# Altium PCB USB Wi-Fi.PcbDoc (part 2 of 2)
Units mm, origin at the board's own origin, x right, y up, seen from the top; angles counter-clockwise.
Board outline 24.6 x 61.64 mm, 2 copper layers (Top, Bottom), stack 1.535 mm thick; 80 components, 55 nets, 291 pads, 187 vias.
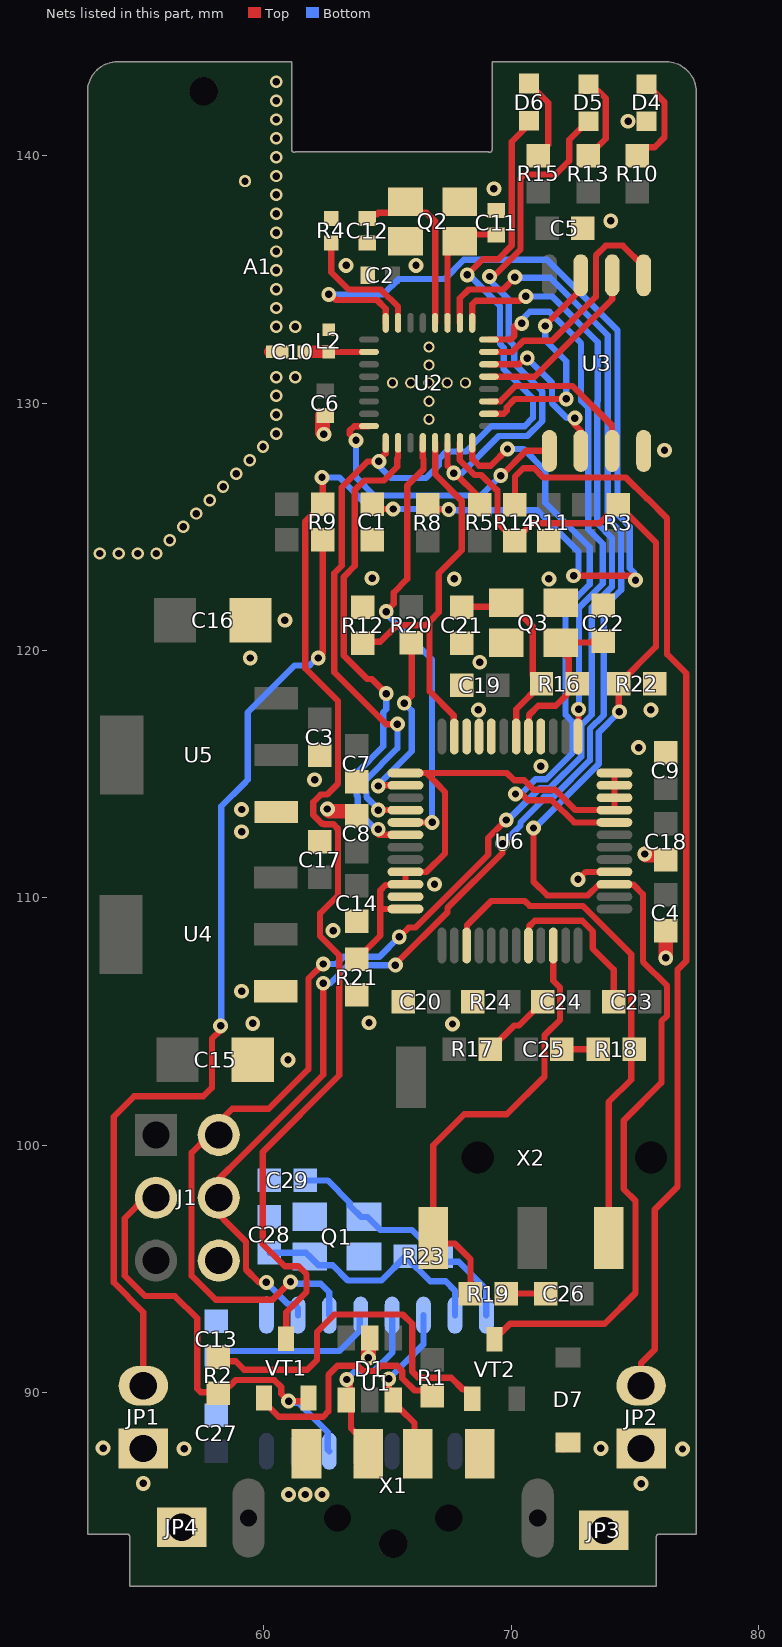
[diagram p2: the nets of this part, all layers, seen from the top]

## Via types
v1: diameter 0.6, hole 0.3, Top to Bottom, tented both sides, 129 vias
v2: diameter 0.5, hole 0.3, Top to Bottom, tented both sides, 58 vias

## Nets (pads, with @x,y where several pads share a name; then routed paths per layer and width w, separated by ;. In a path a pad name is that pad's centre, name@x,y a point inside that pad or via, vN(x,y) a via of type N, cw(c..) or ccw(c..) an arc to the next point about the centre after c; other vN are vias at no path point) (continued)
GND: A1.2 C1.1 C2.1 C3.1 C4.1 C5.2 C6.1 C7.1 C8.1 C9.1 C11.1 C12.1 C13.1 C14.1 C15.2 C16.2 C17.1 C18.1 C19.1 C20.1 C21.1 C22.1 C27.1 C28.1 C29.1 D1.2 D4.2 J1.6 JP1.1 JP2.1 JP4.1 L2.1 Q1.2 Q1.4 Q2.2 Q2.4 Q3.2 Q3.4 R4.2 R11.1 R12.1 R21.1 R22.1 R24.1 U1.1 U2.33 U3.4 U4.1 U5.1 U6.4 U6.16 U6.20 U6.21 U6.22 U6.35 X1.4 | length 6.6
  Top w0.254: v1(64.225,91.4) 64.275,91.4 v1@64.288,91.412 ; D1.2@64.275,92.2 D1.2@64.288,92.187 ; v1(72.7,110.75) 72.722,110.75 73.022,111.05 U6.4@74.175,111.05
  Top w0.6: v1@62.375,128.823 62.375,129.5 C6.1@62.475,129.5 ; v1(62.569,113.594) 62.659,113.504 63.037,113.504 63.041,113.5 63.575,113.5 C8.1@63.75,113.325 ; v1(64.225,91.4) 64.225,92.15 D1.2@64.275,92.2 ; v1(75.4,111.775) 75.45,111.725 76.075,111.725 C18.1@76.25,111.55 ; v1(76.25,107.575) C4.1@76.25,108.675
  other v1: 61,85.875 61.675,85.875 62.35,85.875 75.25,86.315 55.125,86.325 76.925,87.715 56.775,87.725 73.625,87.74 53.5,87.75 60.975,103.45 67.625,104.9 59.55,104.925 64.25,104.95 59.1,106.225 62.8,108.675 66.9,110.55 59.1,112.675 59.1,113.575 62.05,114.775 71.2,115.325 75.15,116.075 68.675,117.6 75.65,117.6 68.725,119.525 59.45,119.7 60.85,121.225 67.7,122.9 71.525,122.9 64.375,122.925 76.2,128.1 62.425,128.75 63.325,135.575 66.15,135.575 74.025,137.375 69.3,138.675 74.725,141.4
  other v2: 53.369,123.924 54.131,123.924 54.893,123.924 55.655,123.924 56.194,124.462 56.733,125.001 57.271,125.54 57.81,126.079 58.349,126.618 58.888,127.157 59.427,127.695 59.966,128.234 60.504,128.773 60.504,129.535 60.504,130.297 60.504,131.059 61.266,131.059 60.504,133.091 61.266,133.091 60.504,133.853 60.504,134.615 60.504,135.377 60.504,136.139 60.504,136.901 60.504,137.663 60.504,138.425 60.504,139.187 60.504,139.949 60.504,140.711 60.504,141.473 60.504,142.235 60.504,142.997
GPIO00: R3.2 R14.1 R22.2 U2.15 U6.3 VT2.3 | length 57
  Top w0.254: U2.15@67.925,128.4 67.925,127.702 68.531,127.096 68.8,127.096 69.348,126.548 69.377,126.548 69.448,126.477 69.448,125.152 R14.1@70.15,124.45 70.852,125.152 72.094,125.152 72.096,125.15 72.329,125.15 72.331,125.152 73.577,125.152 R3.2@74.325,125.9 ; VT2.3@69.325,92.15 69.95,92.775 73.775,92.775 75.025,94.025 75.025,97.75 74.55,98.225 74.55,101 76.075,102.525 76.075,105.004 76.302,105.231 76.302,106.448 75.325,107.425 75.325,110.15 74.943,110.532 74.193,110.532 U6.3@74.175,110.55 73.556,110.55 73.106,110.1 71.45,110.1 70.9,110.65 v1(70.9,112.825) ; R3.2@74.15,126.075 R3.2@74.325,125.9 ; v1(74.375,117.525) 74.35,117.55 R22.2@74.35,118.65 75.852,120.152 75.852,124.373 R3.2@74.325,125.9
  Bottom w0.254: v1(70.9,112.825) 70.947,112.825 73.537,115.415 73.537,116.687 v1(74.375,117.525)
GPIO02: D5.2 R5.2 U2.14 | length 23.3
  Top w0.254: U2.14@67.425,128.4 67.425,127.804 67.427,127.802 67.427,127.473 67.7,127.2 68.725,126.175 R5.2@68.725,125.9 R5.2@68.493,126.132 ; v1(69.125,135.125) 69.125,135.025 69.15,135 70.379,136.229 70.379,139.1 70.531,139.252 71.802,139.252 72.35,139.8 72.35,140.65 73.1,141.4 D5.2@73.125,141.4
  Bottom w0.254: v1@67.9,127.15 67.975,127.15 69.502,128.677 70.648,128.677 71.25,129.279 71.25,130.48 70.123,131.607 70.123,132.328 69.9,132.551 69.9,133.445 69.904,133.449 69.904,134.196 69.125,134.975 v1(69.125,135.125)
  other v1: 67.675,127.175
GPIO04: U2.16 U6.8 | length 24.5
  Top w0.254: U2.16@68.425,128.4 68.425,127.75 68.7,127.475 69.175,127.475 v1(69.85,128.15) ; v1(70.175,114.2) 70.425,114.2 70.675,113.95 71.645,113.95 72.545,113.05 U6.8@74.175,113.05
  Bottom w0.254: v1(69.85,128.15) 70.5,128.15 71.375,127.275 71.375,125.975 73.175,124.175 73.175,122.675 72.198,121.698 72.198,117.407 72.475,117.13 72.475,115.855 71.418,114.798 70.982,114.798 70.359,114.175 v1@70.15,114.175
GPIO05: U2.24 U6.13 | length 21.9
  Top w0.254: U2.24@69.1,132.575 69.227,132.575 69.229,132.577 69.977,132.577 70.118,132.718 70.118,133.098 70.141,133.121 70.4,133.121 70.427,133.148 v1(70.427,133.227) ; U6.13@72.7,116.525 72.718,116.543 72.718,117.161 72.725,117.168 v1(72.725,117.625)
  Bottom w0.254: v1@70.427,133.077 v1(70.427,133.227) 70.427,133.377 70.75,133.7 71.545,133.7 72.825,132.42 72.825,130.1 73.113,129.813 73.113,126.554 73.121,126.545 73.121,124.904 73.704,124.321 73.704,122.703 72.744,121.743 72.744,117.644 v1(72.725,117.625)
GPIO12: U2.10 U6.30 | length 20.3
  Top w0.254: v1(64.625,112.775) 64.625,112.575 64.65,112.55 U6.30@65.725,112.55 ; v1(64.95,118.262) 64.362,118.85 64.175,118.85 63.225,119.8 63.225,122.975 63.673,123.423 63.673,126.494 64.052,126.873 64.843,126.873 65.398,127.428 65.398,127.768 65.425,127.795 U2.10@65.425,128.4
  Bottom w0.254: v1(64.625,112.775) 64.625,112.669 64.452,112.842 64.452,112.843 64.081,113.215 63.941,113.215 63.796,113.359 63.796,114.102 63.745,114.153 63.745,114.159 63.744,114.16 63.744,114.89 63.745,114.891 63.745,115.046 64.825,116.126 64.825,117.5 64.95,117.625 v1(64.95,118.262)
GPIO13: U2.12 U6.29 | length 17.8
  Top w0.254: v1(64.95,121.575) 64.95,121.599 65.248,121.897 65.248,122.344 65.8,122.896 65.8,126.675 66.452,127.327 66.452,127.768 66.425,127.795 U2.12@66.425,128.4 ; U6.29@65.725,113.05 v1(66.8,113.05)
  Bottom w0.254: v1(64.95,121.575) 64.95,121.481 66.8,119.631 v1(66.8,113.05)
GPIO14: D6.2 U2.9 U6.28 | length 42
  Top w0.254: v1(64.625,113.55) U6.28@65.725,113.55 ; U2.9@64.925,128.4 64.925,127.972 64.65,127.697 v1(64.65,127.65) 64.647,127.647 64.197,127.647 63.15,126.6 63.15,123.425 62.85,123.125 62.85,119.125 64.95,117.025 v1(65.4,117.025) ; v1(68.225,135.188) 68.225,135.2 68.853,135.828 69.474,135.828 70.025,136.379 70.025,140.575 70.85,141.4 D6.2@70.7,141.4 ; D6.2@70.475,141.4 D6.2@70.7,141.4 ; D6.2@70.725,141.425 D6.2@70.7,141.4
  Bottom w0.254: v1(64.625,113.55) 64.625,113.6 64.15,114.075 64.15,114.249 64.099,114.3 64.099,114.306 64.098,114.307 64.098,114.743 65.4,116.045 v1(65.4,117.025) ; v1(64.65,127.65) 64.65,127.469 65.144,126.975 66.55,126.975 67.073,127.498 67.073,127.743 67.382,128.052 68.177,128.052 69.2,129.075 70.545,129.075 70.877,129.407 70.877,130.198 69.7,131.375 69.7,132.25 69.546,132.404 69.546,133.592 69.55,133.596 69.55,133.931 68.293,135.188 v1(68.225,135.188) 68.225,135.27 v1@68.23,135.275
GPIO15: R12.2 U2.13 U6.23 | length 16.3
  Top w0.254: R12.2@64,120.3 64.053,120.353 64.707,120.353 65.381,121.027 66.552,121.027 66.7,121.175 ; U2.13@66.925,128.4 66.925,127.125 68.002,126.048 68.002,124.052 67.075,123.125 67.075,121.55 66.7,121.175 ; U6.23@67.7,116.525 67.682,116.543 67.682,117.161 67.675,117.168 67.675,117.376 66.7,118.351 66.7,121.175
GPIO16: U2.8 U3.1 | length 12.2
  Top w0.254: v1(63.725,128.5) 63.475,128.75 63.475,128.9 63.65,129.075 U2.8@64.25,129.075 ; v1@69.641,127.141 v1(69.575,127.075) 69.6,127.075 70.6,128.075 U3.1@71.545,128.075 71.545,128.252 71.385,128.412 U3.1@71.372,128.399
  Bottom w0.254: v1(63.725,128.5) 63.725,127 64.458,126.267 68.767,126.267 v1(69.575,127.075)
LO: R19.2 U6.46 X2.4 | length 18.3
  Top w0.254: R19.2@68.35,94 68.35,95.4 67.725,96.025 67.075,96.025 X2.4@66.85,96.25 66.85,100 68.1,101.25 69.825,101.25 71.348,102.773 71.348,104.444 71.977,105.073 71.977,106.369 71.7,106.646 U6.46@71.7,108.075
NetA1_1: A1.1 C10.1 | length 0.5
  Top w0.508: A1.1@60.25,132.075 C10.1@60.725,132.075
NetC11_2: C11.2 Q2.1 U2.27 | length 5.2
  Top w0.254: U2.27@67.425,133.25 67.425,136 67.975,136.55 68.25,136.825 C11.2@69.5,136.825
NetC12_2: C12.2 Q2.3 U2.28 | length 7.4
  Top w0.254: C12.2@64.225,137.475 64.398,137.648 64.57,137.648 64.624,137.702 65.327,137.702 65.775,138.15 66.223,137.702 66.573,137.702 66.925,137.35 U2.28@66.925,133.25
NetC13_2: C13.2 U1.4 | length 6.9
  Bottom w0.254: C13.2@58.075,91.425 58.325,91.675 63.05,91.675 63.88,92.505 63.88,93.09 U1.4@63.915,93.125
NetC21_2: C21.2 Q3.1 R16.1 U6.18 | length 7.9
  Top w0.254: C21.2@67.975,121.775 69.2,121.775 69.35,121.925 Q3.1@69.475,121.925 ; Q3.1@69.925,121.925 70.875,120.975 70.875,119 R16.1@71.225,118.65 70.2,117.625 U6.18@70.2,116.525
NetC22_2: C22.2 Q3.3 R16.2 U6.17 | length 7.8
  Top w0.254: U6.17@70.7,117.101 U6.17@70.7,116.525 70.718,116.543 70.718,117.393 71.097,117.772 71.797,117.772 R16.2@72.675,118.65 72.327,118.998 72.327,119.673 Q3.3@71.675,120.325 ; Q3.3@71.55,120.325 Q3.3@71.675,120.325 ; C22.2@73.275,120.375 73.225,120.325 Q3.3@71.675,120.325
NetC23_2: C23.2 U6.44 | length 6.8
  Top w0.254: U6.44@70.7,108.075 70.718,108.093 70.718,108.843 70.95,109.075 72.869,109.075 73.3,108.644 73.3,107.95 74.15,107.1 C23.2@74.15,105.8
NetC24_2: C24.2 R17.1 | length 2.9
  Top w0.254: R17.1@69.15,103.875 70.113,104.838 70.313,104.838 C24.2@71.275,105.8
NetC25_2: C25.2 R18.1 | length 1.5
  Top w0.254: C25.2@72.05,103.875 R18.1@73.525,103.875
NetC26_2: C26.2 R19.1 | length 1.6
  Top w0.254: R19.1@69.8,94 C26.2@71.4,94
NetC28_2: C28.2 Q1.1 R23.1 U1.7 | length 9.9
  Bottom w0.254: C28.2@60.225,95.65 61.7,95.65 Q1.1@61.85,95.5 62.207,95.143 62.782,95.143 63.4,94.525 64.75,94.525 R23.1@65.725,95.5 66.725,94.5 67.35,94.5 67.725,94.125 U1.7@67.725,93.125
NetC29_2: C29.2 Q1.3 R23.2 U1.8 | length 10.3
  Bottom w0.254: C29.2@61.675,98.575 62.575,98.575 63.477,97.673 63.477,97.548 63.925,97.1 Q1.3@64.05,97.1 64.175,97.1 64.7,96.575 65.975,96.575 67.05,95.5 R23.2@67.175,95.5 67.382,95.293 67.882,95.293 68.995,94.18 U1.8@68.995,93.125
NetD1_4: D1.4 U1.5 X1.3 | length 7.4
  Top w0.254: v1(63.35,90.525) 63.418,90.525 63.484,90.459 63.484,89.859 D1.4@63.325,89.7 63.525,89.5 63.525,88.547 63.674,88.398 63.752,88.398 64.225,87.925 X1.3@64.225,87.525
  Bottom w0.254: v1(63.35,90.525) 63.698,90.873 64.443,90.873 65.185,91.615 U1.5@65.185,93.125
NetD1_6: D1.6 U1.6 X1.2 | length 6.7
  Top w0.254: v1(65.05,90.55) 65.05,89.725 65.448,89.327 65.523,89.327 66.093,88.757 66.093,87.607 X1.2@66.175,87.525
  Bottom w0.254: v1(65.05,90.55) 66.455,91.955 U1.6@66.455,93.125
NetD4_1: D4.1 R10.1 | length 3.9
  Top w0.254: R10.1@75.1,140 75.448,140.348 75.798,140.348 76.2,140.75 76.2,142.175 D4.1@75.475,142.9
NetD5_1: D5.1 R13.2 | length 3.6
  Top w0.254: R13.2@73.125,140 73.825,140.7 73.825,142.325 73.523,142.627 73.398,142.627 D5.1@73.125,142.9
NetD6_1: D6.1 R15.2 | length 3.5
  Top w0.254: D6.1@70.725,142.925 71.5,142.15 71.5,140.45 71.398,140.348 71.373,140.348 R15.2@71.025,140
NetD7_1: D7.1 JP3.1 X1.1 | length 0.2
  Top w0.6: D7.1@72.1,87.876 72.1,87.88 72.2,87.98 D7.1@72.3,87.98
NetJP1_2: JP1.2 R9.1 | length 40.5
  Top w0.254: JP1.2@55.125,90.275 55.125,93.25 53.925,94.45 53.925,101.15 54.75,101.975 57.548,101.975 57.9,102.327 57.9,104.304 58.25,104.654 v1(58.25,104.825) 58.396,104.825 v1@58.398,104.827 ; v1(62.2,119.7) 62.375,119.875 R9.1@62.375,124.475
  Bottom w0.254: v1(58.25,104.825) 58.328,104.825 58.411,104.908 58.275,105.044 58.275,113.7 59.2,114.625 ; 59.201,114.625 59.35,114.774 59.35,117.5 61.25,119.4 61.85,119.4 62.15,119.7 v1(62.2,119.7)
NetJP2_2: JP2.2 R14.2 | length 44.4
  Top w0.254: R14.2@70.15,125.9 70.15,127.025 70.494,127.369 70.524,127.369 70.53,127.375 70.925,127.375 71.302,126.998 74.627,126.998 75.473,126.152 75.493,126.152 76.304,125.341 76.304,119.846 77.075,119.075 77.075,107.448 76.725,107.098 76.725,104.875 76.726,104.874 76.726,98.326 75.8,97.4 75.8,91.74 75.25,91.19 JP2.2@75.25,90.265
NetR1_1: R1.1 VT1.1 | length 10
  Top w0.254: VT1.1@60.198,89.577 VT1.1@60,89.775 60,89.6 60.198,89.402 60.223,89.402 60.6,89.025 62.4,89.025 62.609,89.234 62.609,90.709 62.977,91.077 63.803,91.077 64.007,90.873 64.518,90.873 64.722,91.077 65.393,91.077 65.6,90.87 65.6,90.575 66.093,90.082 66.593,90.082 R1.1@66.8,89.875
NetR2_1: R2.1 VT2.1 | length 14.7
  Top w0.254: R2.1@58.15,91.425 58.307,91.268 58.857,91.268 59.2,90.925 61.75,90.925 62.15,91.325 62.15,92.45 62.85,93.15 65.625,93.15 66,92.775 66,90.85 66.25,90.6 67.575,90.6 68.052,90.123 68.227,90.123 68.425,89.925 VT2.1@68.425,89.75
NetR4_1: R4.1 U2.31 | length 5.1
  Top w0.254: R4.1@62.725,136.475 62.725,135.3 63.427,134.598 64.727,134.598 65.425,133.9 U2.31@65.425,133.25
NetR20_1: R20.1 U6.26 | length 7.7
  Top w0.254: v1(64.625,114.525) 64.65,114.55 U6.26@65.725,114.55 ; v1(65.675,117.875) 65.975,118.175 65.975,120.3 R20.1@65.95,120.325
  Bottom w0.254: v1(64.625,114.525) 64.625,114.575 65.975,115.925 65.975,117.575 v1(65.675,117.875)
NetR21_2: R21.2 U6.9 U6.10 U6.11 U6.12 U6.25 U6.33 U6.34 U6.36 | length 21.2
  Top w0.254: R21.2@63.75,107.525 64.7,108.475 64.7,109.612 ; U6.34@65.075,110.525 64.925,110.525 64.7,110.3 64.7,109.612 ; U6.36@65.725,109.55 64.762,109.55 64.7,109.612 ; U6.34@65.725,110.55 U6.33@65.725,111.05 66.575,111.05 67.327,111.802 67.327,114.268 66.575,115.05 ; U6.25@65.725,115.05 66.575,115.05 ; U6.12@74.175,115.05 U6.11@74.175,114.55 U6.10@74.175,114.05 U6.9@74.175,113.55 72.6,113.55 71.775,114.375 70.904,114.375 70.526,114.753 70.122,114.753 69.824,115.05 66.575,115.05
nRST: C1.2 R8.2 R9.2 U2.32 VT1.3 | length 84.7
  Top w0.254: VT1.3@60.9,92.175 60.9,93.25 61.725,94.075 61.725,94.775 61.4,95.1 60.85,95.1 59.95,96 59.95,99.725 63.048,102.823 63.048,107.682 62.273,108.457 62.273,109.373 63,110.1 63,112.798 62.952,112.798 62.952,112.844 62.819,112.977 62.441,112.977 62.418,113 62.35,113 62,113.35 62,113.875 62.302,114.177 62.552,114.177 63,114.625 63,117.95 61.673,119.277 61.673,125.223 R9.2@62.375,125.925 62.375,126.975 v1(62.35,127) ; v1(62.625,134.4) 62.694,134.4 62.917,134.177 64.573,134.177 64.925,133.825 U2.32@64.925,133.25 ; C1.2@64.375,125.925 64.4,125.95 64.625,125.725 v1(65.225,125.725) ; R8.2@66.625,125.9 66.825,125.7 v1(67.475,125.7) ; v1(72.525,123.025) 74.85,123.025 v1(75.025,122.85)
  Bottom w0.254: v1(62.35,127) 63.05,127 64.325,125.725 v1(65.225,125.725) v1@67.475,125.725 ; v1(62.625,134.4) 64.825,134.4 65.45,135.025 67.305,135.025 68.082,135.802 71.448,135.802 74.298,132.952 74.298,125.792 74.3,125.79 74.3,125.5 74.798,125.002 74.798,123.332 74.959,123.171 74.959,122.916 v1(75.025,122.85) ; v1(72.525,123.025) 72.719,123.219 72.719,124.006 71.05,125.675 67.7,125.675 v1@67.575,125.8 ; v1@67.475,125.725 v1@67.5,125.725 ; v1@67.475,125.725 v1(67.475,125.7) v1@67.5,125.725 ; v1@67.5,125.725 v1@67.575,125.8 ; v1@67.5,125.725 67.65,125.725 v1@67.575,125.8
RF: C10.2 L2.2 U2.2 | length 2.8
  Top w0.254: L2.2@62.625,132.075 U2.2@64.25,132.075
  Top w0.508: C10.2@61.625,132.075 L2.2@62.625,132.075 L2.2@62.43,132.075
RO: R18.2 U6.39 X2.2 | length 20.7
  Top w0.254: U6.39@68.2,108.075 68.212,108.087 68.212,108.892 69.195,109.875 70.55,109.875 70.75,109.675 72.901,109.675 74.852,107.724 74.852,105.231 74.85,105.229 74.85,104 R18.2@74.975,103.875 74.85,103.75 74.85,102.65 73.95,101.75 X2.2@73.95,96.25
RTS: J1.3 R2.2 U1.14 VT1.2 | length 18.4
  Top w0.254: J1.3@55.275,97.95 54.375,97.05 54.375,94.725 55.2,93.9 56.4,93.9 57.3,93 57.3,90.875 57.3,90.156 57.449,90.007 58.118,90.007 R2.2@58.15,89.975 ; R2.2@58.182,89.993 58.343,89.993 58.852,90.502 60.419,90.502 60.7,90.221 60.7,89.95 v1(61,89.65) 61.8,89.65 VT1.2@61.8,89.775
  Bottom w0.254: v1(61,89.65) 61.065,89.585 61.39,89.585 62.579,88.396 62.579,87.691 U1.14@62.645,87.625
RXD0: J1.2 U1.3 U2.25 | length 61.3
  Top w0.254: v1(61.075,94.475) 60.348,93.748 58.052,93.748 57.075,94.725 57.075,99.7 57.725,100.35 57.725,100.475 58.725,101.475 60.2,101.475 61.8,103.075 61.8,106.725 v1(62.4,107.325) ; v1(65.475,108.425) 65.85,108.8 66.125,108.8 69.075,111.75 69.075,112.425 v1(69.8,113.15) ; U2.25@68.425,133.25 68.425,134.001 68.574,134.15 70.331,134.15
  Bottom w0.254: J1.2@58.175,100.415 J1.2@58.24,100.35 ; v1(61.075,94.475) 61.141,94.409 61.386,94.409 61.395,94.4 62.3,94.4 62.645,94.055 U1.3@62.645,93.125 ; v1(62.4,107.325) 62.925,107.325 63.225,107.625 64.675,107.625 v1(65.475,108.425) ; v1(69.8,113.15) 69.87,113.15 71.164,114.444 71.565,114.444 72.829,115.708 72.829,116.984 73.254,117.409 73.254,121.753 74.075,122.574 74.075,124.55 73.475,125.15 73.475,130.075 ; v1(70.594,134.319) 71.656,134.319 73.5,132.475 73.5,130.1
SCK/CLK: U2.21 U3.6 | length 7.2
  Top w0.254: U2.21@69.1,131.075 70.95,131.075 74.085,134.21 U3.6@74.085,135.175
SDI/SD1: U2.23 U3.5 | length 9.7
  Top w0.254: U2.23@69.1,132.075 70.05,132.075 70.498,132.523 71.648,132.523 73.425,134.3 73.425,135.975 73.825,136.375 74.509,136.375 75.355,135.529 U3.5@75.355,135.175
SDO/SD0: U2.22 U3.2 | length 6.2
  Top w0.254: U2.22@69.1,131.575 70.328,131.575 70.578,131.825 v1(70.65,131.825) ; v1@72.575,129.131 72.815,128.891 U3.2@72.815,128.075
  Bottom w0.254: v1(70.65,131.825) 71.65,130.825 71.65,130.005 72.255,129.4 v1(72.575,129.4)
SHD/SD2: U2.18 U3.7 | length 9.9
  Top w0.254: U2.18@69.1,129.575 69.7,129.575 69.823,129.698 69.823,129.843 70.155,130.175 v1(72.225,130.175) ; v1(71.375,133.125) 71.375,133.153 72.815,134.593 U3.7@72.815,135.175 U3.7@72.815,135.69
  Bottom w0.254: v1(71.375,133.125) 71.375,132.55 72.225,131.7 v1(72.225,130.175)
SWP/SD3: U2.19 U3.3 | length 6.9
  Top w0.254: U2.19@69.1,130.075 69.554,130.075 70.181,130.702 72.475,130.702 74.077,129.099 74.077,128.083 U3.3@74.085,128.075
TXD0: J1.4 U1.2 U2.26 | length 58.6
  Top w0.254: v1(60.1,94.45) 59.8,94.45 59.275,94.975 59.275,96.1 57.463,97.912 57.8,98.25 59.45,99.9 62.4,102.85 v1(62.4,106.55) ; v1(65.315,107.282) 65.315,107.308 67.423,109.417 67.423,109.593 69.65,111.82 v1(69.65,112.2) ; U2.26@67.925,133.25 67.925,134.25 68.273,134.598 69.343,134.598 69.345,134.6 69.675,134.6 70.15,135.075 v1(70.15,135.1)
  Bottom w0.254: v1(60.1,94.45) 60.972,93.578 61.215,93.578 61.375,93.418 U1.2@61.375,93.125 ; v1(62.4,106.55) 62.675,106.55 63.396,107.271 65.304,107.271 v1(65.315,107.282) ; v1(69.65,112.2) 70.373,112.923 70.373,113.043 71.311,113.981 71.311,114.09 71.712,114.09 73.183,115.561 73.183,116.837 73.739,117.393 73.739,121.737 74.454,122.452 74.454,123.175 74.444,123.185 74.444,124.781 73.9,125.325 73.9,132.749 71.574,135.075 v1@70.15,135.075
pads on no net: D1.1 D1.3 T1.1 T2.1 U1.9 U1.10 U1.11 U1.12 U1.15 U2.5 U2.20 U6.1 U6.2 U6.15 U6.27 U6.48 X1. X1.5 X1.6 X2. X2.3

## Polygon pours and split planes (outlines as drawn)
GND on Bottom "Bottom Layer4-GND" (solid, remove dead copper, pour order 21): 58.7,143.8 58.7,132.827 60.255,132.821 60.255,128.93 55.55,124.225 52.875,124.225 52.875,84.276 54.575,84.275 54.575,82.176 75.874,82.176 75.875,84.275 77.475,84.275 77.475,143.8 69.225,143.8 69.225,140.175 61.125,140.175 61.125,143.799
3v3A on Bottom "Bottom Layer4-No Net" (solid, remove dead copper, pour order 0): 52.975,104.125 54.725,104.125 54.725,96.3 56.475,96.3 56.475,93.675 52.875,93.675 52.875,104.125
AGND on Bottom "Bottom Layer4-AGND" (solid, remove dead copper, pour order 4): 66.375,107.7 73.575,107.7 77.475,103.8 77.475,98.425 68.2,98.425 64.525,102.1 64.525,103.6 69.15,103.6 69.15,106.45 66.375,106.45
+5V on Bottom "Bottom Layer4-+5V" (solid, remove dead copper, pour order 19): 72.6,89.925 70.425,89.925 70.425,96.4 66.95,96.4 62.1,101.25 62.1,103.225 59.7,105.625 59.7,117.475 60.15,117.925 61.825,117.925 61.825,116.075 61.225,115.475 61.225,106.675 64.375,103.525 64.375,102.3 68.175,98.5 72.6,98.5
1v8 on Bottom "Bottom Layer4-1v8" (solid, remove dead copper, pour order 17): 56.6,119.55 55.925,120.225 52.9,120.225 52.9,112.25 55.922,112.25 56.6,112.917
3v3A on Bottom "Bottom Layer4-3v3A" (solid, remove dead copper, pour order 14): 56.65,111.35 55.925,112.075 52.875,112.075 52.875,104.1 55.743,104.1 56.65,104.992
GND on Top "Top Layer1-GND" (solid, remove dead copper, pour order 43): 75.875,84.275 77.475,84.275 77.475,92.975 67.725,92.975 64.4,96.3 64.4,104.05 69.059,104.05 69.059,106.375 66.3,106.375 66.3,107.975 77.475,107.975 77.475,143.8 69.225,143.8 69.225,140.175 61.125,140.175 61.125,143.799 60.25,143.8 60.255,132.821 65.31,132.821 65.33,132.801 65.33,131.321 60.255,131.321 60.253,128.928 55.55,124.225 52.875,124.225 52.875,84.276 54.575,84.275 54.575,82.176 75.875,82.175
NetD7_1 on Top "Top Layer1-NetD7_1 1" (solid, remove dead copper, pour order 37): 72.8,87.6 72.8,87.175 74.75,85.225 74.75,83.625 72.75,83.625 72.75,85.225 71.46,86.515 71.46,87.6
AGND on Top "Top Layer1-AGND" (solid, remove dead copper, pour order 51): 75.125,104.4 75.125,105.65 75.375,105.9 75.4,105.875 76.075,105.875 76.075,105.35 75.725,105.025 75.725,104.4
AGND on Top "Top Layer1-AGND 1" (solid, remove dead copper, pour order 49): 72.025,107.725 72.025,106.86 72.325,106.2 73.2,106.2 73.2,106.5 72.375,107.325 72.375,107.725
3v3A on Top "Top Layer1-3v3A 1" (solid, remove dead copper, pour order 35): 71.85,135.125 71.85,136.55 71.925,136.625 71.925,137.55 72.45,138.075 75.575,138.075 75.575,139.025 70.625,139.025 70.625,137.9 70.975,137.55 70.975,136.6 71.25,136.325 71.25,135.125
3v3A on Top "Top Layer1-3v3A 2" (solid, remove dead copper, pour order 52): 71.95,123.425 75.525,123.425 75.525,124.2 74.775,124.95 72.475,124.95 72.475,124.3 71.975,123.8 71.975,123.45
+5V on Top "Top Layer1-+5V 2" (solid, remove dead copper, pour order 33): 59.6,109.925 60,109.525 61.875,109.525 62.725,110.375 62.725,111.3 59.6,111.3
+5V on Top "Top Layer1-+5V 1" (solid, remove dead copper, pour order 29): 59.625,117.625 60.5,116.75 62.725,116.75 62.725,117.7 62.2,117.7 61.375,118.525 59.625,118.525
AGND on Top "Top Layer1-AGND 2" (solid, pour order 47): 69.425,106.275 70.025,106.875 70.55,106.875 70.75,106.675 70.75,106.375 70.25,105.875 69.425,105.875
AGND on Top "Top Layer1-AGND 3" (solid, remove dead copper, pour order 39): 68.55,106.65 68.55,107.925 68.7,108.075 69.325,108.075 69.35,108.05 69.35,106.875 69.15,106.65
AGND on Top "Top Layer1-AGND 4" (solid, remove dead copper, pour order 31): 66.5,106.675 66.5,107.95 66.702,108.152 67.325,108.152 67.325,106.95 67.05,106.675
1v8 on Top "Top Layer1-1v8" (solid, remove dead copper, pour order 12): 61.375,116.225 59.05,116.225 56.1,119.175 52.875,119.175 52.875,112.425 56.1,112.425 59.05,115.325 61.375,115.325
3v3A on Top "Top Layer1-3v3A" (solid, remove dead copper, pour order 10): 61.35,108.975 59.025,108.975 56.075,111.925 52.875,111.925 52.875,105.175 56.075,105.175 59.025,108.075 61.35,108.075
+5V on Top "Top Layer1-+5V" (solid, remove dead copper, pour order 8): 70.9,90 71.775,90 72.8,91.025 72.8,92.25 70.9,92.25
NetD7_1 on Top "Top Layer1-NetD7_1" (solid, remove dead copper, pour order 6): 68.075,86.525 70.75,86.525 71.8,86.525 72.8,87.575 72.8,88.375 69.425,88.375 69.275,88.525 68.075,88.525

## Keep-outs
Keep-Out Layer:
  lines w0.2: 52.771,142.6 cw(c54.075,142.6) 54.075,143.904 ; 52.775,142.775 52.775,84.175 54.475,84.175 54.475,82.075 75.975,82.075 75.975,84.175 77.575,84.175 77.575,142.775 ; 54.175,143.9 61.225,143.9 61.225,140.25 ; 61.225,140.275 69.125,140.275 ; 69.125,140.25 69.125,143.9 76.175,143.9 ; 76.275,143.904 cw(c76.275,142.6) 77.579,142.6

## Silkscreen, mask and mechanical layers (free items; w line width, h text height)
Top Overlay:
  circle w0.2: c65.325,117.475 r1
  lines w0.1: 52.8,85.375 54.475,85.375 54.475,86.35 52.8,86.35 ; 52.8,103.225 54.475,103.225 54.475,104.2 52.8,104.2 ; 52.8,137.825 54.475,137.825 54.475,138.575 52.8,138.575 ; 52.825,120.725 54.475,120.725 54.475,119.95 52.85,119.95 ; 77.5,119.95 75.875,119.95 75.875,120.725 77.525,120.725 ; 77.55,85.375 75.875,85.375 75.875,86.35 77.55,86.35 ; 77.55,103.225 75.875,103.225 75.875,104.2 77.55,104.2 ; 77.55,137.825 75.875,137.825 75.875,138.575 77.55,138.575
  text "PLY" at 72.275,140.875 h0.91 r90
  text "POW" at 77.075,140.825 h0.91 r90
  text "COM" at 74.625,140.75 h0.91 r90
  text "RADIO STICK" at 56.625,127 h3 r90
  text "V1.0" at 58.05,127 h1.5 r90
  text "DTR" at 53.975,100.1 h0.91 r90
  text "RX" at 60.775,99.8 h0.91 r90
  text "TX" at 60.825,97.175 h0.91 r90
  text "RTS" at 54.025,96.875 h0.91 r90
  text "GND" at 60.85,94.1 h0.91 r90
  text "3V3" at 54.025,93.775 h0.91 r90
  text "RST" at 53.975,92.025 h0.91
  text "FSH" at 74.075,92.025 h0.91
Bottom Overlay:
  drawing of 57 lines, arcs and shapes, not listed
  text "Tool->" at 53.575,139.25 h0.8 r225
  text "MADE BY" at 75.975,135.625 h0.91 r270
  text "16M flash / 32M flash / 128M flash / CH340" at 61,104.175 h1.5 r270
  text "WiFi - ESP8266 / DEC - VS1053 / Vin - 5V" at 69.975,102.2 h0.91 r270
  text "JLCJLCJLCJLC" at 53.325,95.1 h0.91 r270
  text "<-Tool" at 64.325,82.925 h0.8
Mechanical 5:
  drawing of 183 lines, arcs and shapes, not listed
  text "1" at 58,47.6 h2
  text "2" at 57.8,41.4 h2
  text "3a" at 57.8,33.9 h2
  text "3b" at 72.4,33.7 h2
  text "3c" at 86.3,33.3 h2
  text "4" at 57.7,25.8 h2
Board:
  lines w0.2: 52.771,142.6 cw(c54.075,142.6) 54.075,143.904 ; 52.775,142.775 52.775,84.175 54.475,84.175 54.475,82.075 75.975,82.075 75.975,84.175 77.575,84.175 77.575,142.775 ; 54.175,143.9 61.225,143.9 61.225,140.25 ; 61.225,140.275 69.125,140.275 ; 69.125,140.25 69.125,143.9 76.175,143.9 ; 76.275,143.904 cw(c76.275,142.6) 77.579,142.6
Top Enclosure:
  drawing of 27 lines, arcs and shapes, not listed
Mechanical Drawing:
  text ".Project" at 33.95,98.65 h3 r90
  text ".VariantName" at 48.075,91.45 h3 r90
  text "Mechanical Drawing" at 41.025,85.275 h3 r90
Top Assembly:
  text ".Project" at 35.575,100.7 h3 r90
  text "Assembly Top" at 42.675,96.2 h3 r90
  text ".VariantName" at 49.7,93.5 h3 r90
Bottom Assembly (Mech14):
  text "Assembly Bottom" at 42.825,133.4 h3 r90
  text ".VariantName" at 49.65,133.075 h3 r90
  text ".Project" at 35.875,127.925 h3 r90

## Dimensions
52.775,84.175 to 54.475,82.075 on Mechanical Drawing
69.125,143.9 to 69.225,140.25 on Mechanical Drawing
61.225,143.925 to 69.125,143.9 on Mechanical Drawing
75.975,82.075 to 54.475,82.075 on Mechanical Drawing
77.579,142.6 to 52.771,142.6 on Mechanical Drawing
75.975,84.175 to 75.975,82.075 on Mechanical Drawing
75.675,143.875 to 75.975,82.075 on Mechanical Drawing